# Altium PCB liuyang.PcbDoc (part 2 of 2)
Units mm, origin at the board's own origin, x right, y up, seen from the top; angles counter-clockwise.
Board outline 90.52 x 68.02 mm, 2 copper layers (Top Layer, Bottom Layer); 126 components, 27 nets, 696 pads, 498 vias.
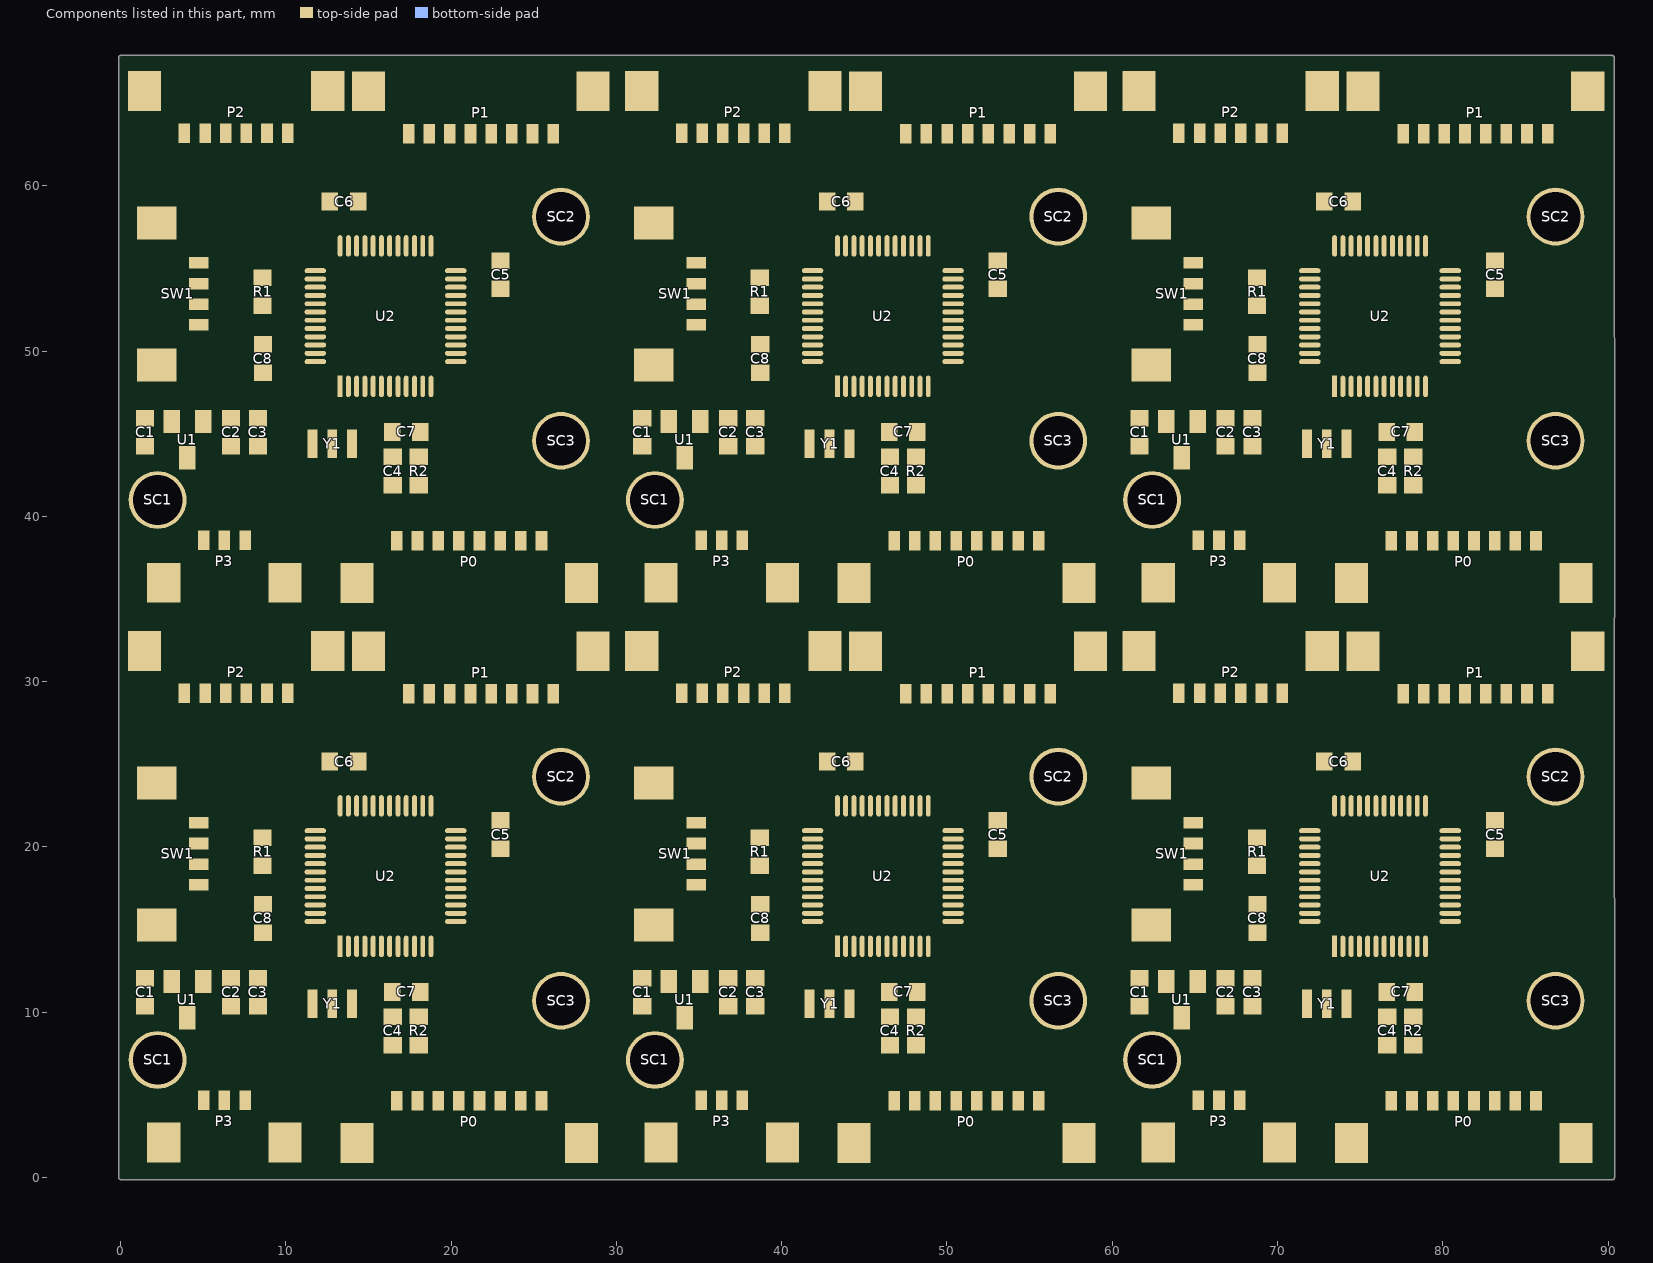
[diagram p2: the components of this part, seen from the top]

## Via types
v1: diameter 0.5, hole 0.3, Top Layer to Bottom Layer, tented both sides, 498 vias

## Nets (pads, with @x,y where several pads share a name; then routed paths per layer and width w, separated by ;. In a path a pad name is that pad's centre, name@x,y a point inside that pad or via, vN(x,y) a via of type N, cw(c..) or ccw(c..) an arc to the next point about the centre after c; other vN are vias at no path point) (continued)
copper on no net: | length 2012.4
  Top Layer w0.254: 4.734,52.842 6.716,52.842 6.934,53.061 6.934,55.093 7.188,55.347 9.855,55.347 10.331,54.871 11.777,54.871 ; 4.734,54.092 6.01,54.092 6.198,54.28 6.198,55.524 6.452,55.778 12.116,55.778 13.157,54.737 14.021,54.737 14.277,54.994 14.277,56.371 ; 5.104,63.185 5.104,56.974 5.715,56.363 v1(10.338,56.363) ; 6.279,38.557 6.279,40.29 9.55,43.561 9.55,46.482 v1(9.525,46.482) ; 8.585,54.444 9.539,54.444 9.754,54.229 9.754,51.613 9.996,51.371 11.777,51.371 ; 8.611,48.706 9.59,48.706 10.255,49.371 11.777,49.371 ; 8.611,50.304 8.712,50.405 ; 8.611,50.405 8.712,50.405 ; 8.854,63.185 8.854,57.237 9.119,56.972 11.811,56.972 12.573,56.21 v1(12.598,56.21) ; v1(9.525,47.854) 10.236,48.565 12.344,48.565 15.113,51.333 v1(18.821,51.333) ; 10.185,46.203 10.871,46.203 12.539,47.871 13.277,47.871 ; v1(10.338,52.832) 10.377,52.871 11.777,52.871 ; 11.602,44.399 11.602,45.714 12.344,46.457 14.554,46.457 15.277,47.18 15.277,47.871 ; 11.777,49.871 10.251,49.871 9.717,50.405 8.712,50.405 ; 12.663,59.055 12.663,57.822 13.277,57.208 13.277,56.371 ; v1(13.589,54.178) 13.589,52.197 13.915,51.871 20.277,51.871 ; 13.777,56.371 13.777,57.237 14.363,57.822 14.363,59.055 ; 14.002,44.399 14.002,45.777 14.173,45.949 15.037,45.949 15.777,46.689 15.777,47.871 ; 15.277,56.371 15.277,59.905 17.418,62.046 17.418,63.16 ; 15.777,56.371 15.777,59.44 18.668,62.331 18.668,63.16 ; 16.277,47.871 16.277,46.533 15.138,45.394 15.138,43.79 15.33,43.598 16.434,43.598 ; 16.277,56.371 16.277,58.645 19.918,62.285 19.918,63.16 ; 16.459,43.598 18.034,43.598 ; 16.777,45.516 v1(16.777,46.05) 16.777,47.871 ; 16.777,56.371 16.777,57.925 21.168,62.316 21.168,63.16 ; 17.277,47.871 17.277,47.112 18.071,46.318 ; 17.277,56.371 17.277,57.638 21.565,61.925 22.073,61.925 22.418,62.271 22.418,63.16 ; 17.777,56.371 17.777,57.376 21.92,61.519 23.419,61.519 23.668,61.768 23.668,63.16 ; 18.096,45.11 18.096,46.318 ; 18.122,45.11 18.872,45.11 19.025,44.958 19.025,40.335 ; 18.277,56.371 18.277,57.216 22.047,60.985 24.13,60.985 24.918,61.773 24.918,63.16 ; 18.777,47.871 18.777,46.856 19.431,46.203 19.431,38.751 19.212,38.532 ; 18.777,56.371 18.777,57.03 22.123,60.376 24.816,60.376 26.168,61.728 26.168,63.16 ; v1(18.847,52.4) 18.876,52.371 20.277,52.371 ; 20.277,49.371 20.462,49.186 20.462,38.532 ; 20.277,49.871 21.122,49.871 21.641,49.352 21.641,41.072 22.022,40.691 25.095,40.691 25.461,40.325 25.461,38.532 ; 20.277,50.371 21.537,50.371 22.25,49.657 22.25,41.656 22.479,41.427 24.181,41.427 v1(24.181,41.504) ; 20.277,50.871 21.824,50.871 22.911,49.784 v1(22.911,42.037) ; 20.277,51.371 22.542,51.371 v1(22.555,51.384) ; 20.277,54.371 21.169,54.371 21.754,53.786 22.987,53.786 ; 20.277,54.871 21.114,54.871 21.729,55.485 22.987,55.485 ; v1(21.031,48.336) 21.057,48.311 21.057,40.716 21.712,40.061 21.712,38.532 ; v1(22.911,39.954) 22.962,39.903 22.962,38.532 ; v1(24.206,39.929) 24.206,38.537 24.212,38.532 ; 34.823,18.958 36.804,18.958 37.023,19.177 37.023,21.209 37.277,21.463 39.944,21.463 40.42,20.987 41.866,20.987 ; 34.823,20.208 36.098,20.208 36.286,20.396 36.286,21.641 36.54,21.895 42.204,21.895 43.246,20.853 44.109,20.853 44.366,21.11 44.366,22.487 ; 34.823,52.842 36.804,52.842 37.023,53.061 37.023,55.093 37.277,55.347 39.944,55.347 40.42,54.871 41.866,54.871 ; 34.823,54.092 36.098,54.092 36.286,54.28 36.286,55.524 36.54,55.778 42.204,55.778 43.246,54.737 44.109,54.737 44.366,54.994 44.366,56.371 ; 35.193,29.302 35.193,23.09 35.804,22.479 v1(40.426,22.479) ; 35.193,63.185 35.193,56.974 35.804,56.363 v1(40.426,56.363) ; 36.368,4.674 36.368,6.406 39.639,9.677 39.639,12.598 v1(39.614,12.598) ; 36.368,38.557 36.368,40.29 39.639,43.561 39.639,46.482 v1(39.614,46.482) ; 38.674,20.56 39.627,20.56 39.842,20.345 39.842,17.729 40.084,17.487 41.866,17.487 ; 38.674,54.444 39.627,54.444 39.842,54.229 39.842,51.613 40.084,51.371 41.866,51.371 ; 38.699,14.822 39.678,14.822 40.343,15.487 41.866,15.487 ; 38.699,16.42 38.801,16.522 ; 38.699,16.522 38.801,16.522 ; 38.699,48.706 39.678,48.706 40.343,49.371 41.866,49.371 ; 38.699,50.304 38.801,50.405 ; 38.699,50.405 38.801,50.405 ; 38.942,29.302 38.942,23.354 39.207,23.089 41.9,23.089 42.662,22.327 v1(42.687,22.327) ; 38.942,63.185 38.942,57.237 39.207,56.972 41.9,56.972 42.662,56.21 v1(42.687,56.21) ; v1(39.614,13.97) 40.325,14.681 42.433,14.681 45.202,17.45 v1(48.91,17.45) ; v1(39.614,47.854) 40.325,48.565 42.433,48.565 45.202,51.333 v1(48.91,51.333) ; 40.274,12.319 40.96,12.319 42.628,13.987 43.366,13.987 ; 40.274,46.203 40.96,46.203 42.628,47.871 43.366,47.871 ; v1(40.426,18.948) 40.465,18.987 41.866,18.987 ; v1(40.426,52.832) 40.465,52.871 41.866,52.871 ; 41.69,10.516 41.69,11.83 42.433,12.573 44.643,12.573 45.366,13.296 45.366,13.987 ; 41.69,44.399 41.69,45.714 42.433,46.457 44.643,46.457 45.366,47.18 45.366,47.871 ; 41.866,15.987 40.34,15.987 39.805,16.522 38.801,16.522 ; 41.866,49.871 40.34,49.871 39.805,50.405 38.801,50.405 ; 42.752,25.171 42.752,23.938 43.366,23.324 43.366,22.487 ; 42.752,59.055 42.752,57.822 43.366,57.208 43.366,56.371 ; v1(43.678,20.295) 43.678,18.313 44.004,17.987 50.366,17.987 ; v1(43.678,54.178) 43.678,52.197 44.004,51.871 50.366,51.871 ; 43.866,22.487 43.866,23.353 44.451,23.938 44.451,25.171 ; 43.866,56.371 43.866,57.237 44.451,57.822 44.451,59.055 ; 44.09,10.516 44.09,11.893 44.262,12.065 45.125,12.065 45.866,12.806 45.866,13.987 ; 44.09,44.399 44.09,45.777 44.262,45.949 45.125,45.949 45.866,46.689 45.866,47.871 ; 45.366,22.487 45.366,26.022 47.507,28.163 47.507,29.276 ; 45.366,56.371 45.366,59.905 47.507,62.046 47.507,63.16 ; 45.866,22.487 45.866,25.556 48.757,28.447 48.757,29.276 ; 45.866,56.371 45.866,59.44 48.757,62.331 48.757,63.16 ; 46.366,13.987 46.366,12.649 45.227,11.51 45.227,9.906 45.419,9.714 46.522,9.714 ; 46.366,22.487 46.366,24.761 50.007,28.402 50.007,29.276 ; 46.366,47.871 46.366,46.533 45.227,45.394 45.227,43.79 45.419,43.598 46.522,43.598 ; 46.366,56.371 46.366,58.645 50.007,62.285 50.007,63.16 ; 46.548,9.714 48.123,9.714 ; 46.548,43.598 48.123,43.598 ; 46.866,11.633 v1(46.866,12.167) 46.866,13.987 ; 46.866,22.487 46.866,24.042 51.257,28.433 51.257,29.276 ; 46.866,45.516 v1(46.866,46.05) 46.866,47.871 ; 46.866,56.371 46.866,57.925 51.257,62.316 51.257,63.16 ; 47.366,13.987 47.366,13.228 48.16,12.434 ; 47.366,22.487 47.366,23.754 51.653,28.042 52.161,28.042 52.507,28.387 52.507,29.276 ; 47.366,47.871 47.366,47.112 48.16,46.318 ; 47.366,56.371 47.366,57.638 51.653,61.925 52.161,61.925 52.507,62.271 52.507,63.16 ; 47.866,22.487 47.866,23.492 52.009,27.635 53.507,27.635 53.757,27.884 53.757,29.276 ; 47.866,56.371 47.866,57.376 52.009,61.519 53.507,61.519 53.757,61.768 53.757,63.16 ; 48.185,11.227 48.185,12.434 ; 48.185,45.11 48.185,46.318 ; 48.211,11.227 48.961,11.227 49.113,11.074 49.113,6.452 ; 48.211,45.11 48.961,45.11 49.113,44.958 49.113,40.335 ; 48.366,22.487 48.366,23.332 52.136,27.102 54.219,27.102 55.007,27.89 55.007,29.276 ; 48.366,56.371 48.366,57.216 52.136,60.985 54.219,60.985 55.007,61.773 55.007,63.16 ; 48.866,13.987 48.866,12.973 49.52,12.319 49.52,4.867 49.3,4.648 ; 48.866,22.487 48.866,23.146 52.212,26.492 54.904,26.492 56.257,27.845 56.257,29.276 ; 48.866,47.871 48.866,46.856 49.52,46.203 49.52,38.751 49.3,38.532 ; 48.866,56.371 48.866,57.03 52.212,60.376 54.904,60.376 56.257,61.728 56.257,63.16 ; v1(48.935,18.517) 48.965,18.487 50.366,18.487 ; v1(48.935,52.4) 48.965,52.371 50.366,52.371 ; 50.366,15.487 50.55,15.303 50.55,4.648 ; 50.366,15.987 51.211,15.987 51.729,15.469 51.729,7.188 52.11,6.807 55.184,6.807 55.55,6.441 55.55,4.648 ; 50.366,16.487 51.625,16.487 52.339,15.773 52.339,7.772 52.568,7.544 54.269,7.544 v1(54.269,7.62) ; 50.366,16.987 51.913,16.987 52.999,15.9 v1(52.999,8.153) ; 50.366,17.487 52.63,17.487 v1(52.644,17.501) ; 50.366,20.487 51.257,20.487 51.843,19.902 53.076,19.902 ; 50.366,20.987 51.203,20.987 51.817,21.602 53.076,21.602 ; 50.366,49.371 50.55,49.186 50.55,38.532 ; 50.366,49.871 51.211,49.871 51.729,49.352 51.729,41.072 52.11,40.691 55.184,40.691 55.55,40.325 55.55,38.532 ; 50.366,50.371 51.625,50.371 52.339,49.657 52.339,41.656 52.568,41.427 54.269,41.427 v1(54.269,41.504) ; 50.366,50.871 51.913,50.871 52.999,49.784 v1(52.999,42.037) ; 50.366,51.371 52.63,51.371 v1(52.644,51.384) ; 50.366,54.371 51.257,54.371 51.843,53.786 53.076,53.786 ; 50.366,54.871 51.203,54.871 51.817,55.485 53.076,55.485 ; v1(51.12,14.453) 51.145,14.427 51.145,6.833 51.8,6.178 51.8,4.648 ; v1(51.12,48.336) 51.145,48.311 51.145,40.716 51.8,40.061 51.8,38.532 ; v1(52.999,6.071) 53.05,6.02 53.05,4.648 ; v1(52.999,39.954) 53.05,39.903 53.05,38.532 ; v1(54.295,6.045) 54.295,4.654 54.3,4.648 ; v1(54.295,39.929) 54.295,38.537 54.3,38.532 ; 64.912,18.958 66.893,18.958 67.111,19.177 67.111,21.209 67.365,21.463 70.032,21.463 70.508,20.987 71.955,20.987 ; 64.912,20.208 66.187,20.208 66.375,20.396 66.375,21.641 66.629,21.895 72.293,21.895 73.334,20.853 74.198,20.853 74.455,21.11 74.455,22.487 ; 64.912,52.842 66.893,52.842 67.111,53.061 67.111,55.093 67.365,55.347 70.032,55.347 70.508,54.871 71.955,54.871 ; 64.912,54.092 66.187,54.092 66.375,54.28 66.375,55.524 66.629,55.778 72.293,55.778 73.334,54.737 74.198,54.737 74.455,54.994 74.455,56.371 ; 65.281,29.302 65.281,23.09 65.892,22.479 v1(70.515,22.479) ; 65.281,63.185 65.281,56.974 65.892,56.363 v1(70.515,56.363) ; 66.457,4.674 66.457,6.406 69.728,9.677 69.728,12.598 v1(69.702,12.598) ; 66.457,38.557 66.457,40.29 69.728,43.561 69.728,46.482 v1(69.702,46.482) ; 68.762,20.56 69.716,20.56 69.931,20.345 69.931,17.729 70.173,17.487 71.955,17.487 ; 68.762,54.444 69.716,54.444 69.931,54.229 69.931,51.613 70.173,51.371 71.955,51.371 ; 68.788,14.822 69.767,14.822 70.432,15.487 71.955,15.487 ; 68.788,16.42 68.889,16.522 ; 68.788,16.522 68.889,16.522 ; 68.788,48.706 69.767,48.706 70.432,49.371 71.955,49.371 ; 68.788,50.304 68.889,50.405 ; 68.788,50.405 68.889,50.405 ; 69.031,29.302 69.031,23.354 69.296,23.089 71.988,23.089 72.75,22.327 v1(72.776,22.327) ; 69.031,63.185 69.031,57.237 69.296,56.972 71.988,56.972 72.75,56.21 v1(72.776,56.21) ; v1(69.702,13.97) 70.413,14.681 72.522,14.681 75.29,17.45 v1(78.999,17.45) ; v1(69.702,47.854) 70.413,48.565 72.522,48.565 75.29,51.333 v1(78.999,51.333) ; 70.363,12.319 71.048,12.319 72.717,13.987 73.455,13.987 ; 70.363,46.203 71.048,46.203 72.717,47.871 73.455,47.871 ; v1(70.515,18.948) 70.554,18.987 71.955,18.987 ; v1(70.515,52.832) 70.554,52.871 71.955,52.871 ; 71.779,10.516 71.779,11.83 72.522,12.573 74.731,12.573 75.455,13.296 75.455,13.987 ; 71.779,44.399 71.779,45.714 72.522,46.457 74.731,46.457 75.455,47.18 75.455,47.871 ; 71.955,15.987 70.428,15.987 69.894,16.522 68.889,16.522 ; 71.955,49.871 70.428,49.871 69.894,50.405 68.889,50.405 ; 72.84,25.171 72.84,23.938 73.455,23.324 73.455,22.487 ; 72.84,59.055 72.84,57.822 73.455,57.208 73.455,56.371 ; v1(73.766,20.295) 73.766,18.313 74.092,17.987 80.455,17.987 ; v1(73.766,54.178) 73.766,52.197 74.092,51.871 80.455,51.871 ; 73.955,22.487 73.955,23.353 74.54,23.938 74.54,25.171 ; 73.955,56.371 73.955,57.237 74.54,57.822 74.54,59.055 ; 74.179,10.516 74.179,11.893 74.35,12.065 75.214,12.065 75.955,12.806 75.955,13.987 ; 74.179,44.399 74.179,45.777 74.35,45.949 75.214,45.949 75.955,46.689 75.955,47.871 ; 75.455,22.487 75.455,26.022 77.596,28.163 77.596,29.276 ; 75.455,56.371 75.455,59.905 77.596,62.046 77.596,63.16 ; 75.955,22.487 75.955,25.556 78.846,28.447 78.846,29.276 ; 75.955,56.371 75.955,59.44 78.846,62.331 78.846,63.16 ; 76.455,13.987 76.455,12.649 75.316,11.51 75.316,9.906 75.507,9.714 76.611,9.714 ; 76.455,22.487 76.455,24.761 80.096,28.402 80.096,29.276 ; 76.455,47.871 76.455,46.533 75.316,45.394 75.316,43.79 75.507,43.598 76.611,43.598 ; 76.455,56.371 76.455,58.645 80.096,62.285 80.096,63.16 ; 76.636,9.714 78.211,9.714 ; 76.636,43.598 78.211,43.598 ; 76.955,11.633 v1(76.955,12.167) 76.955,13.987 ; 76.955,22.487 76.955,24.042 81.346,28.433 81.346,29.276 ; 76.955,45.516 v1(76.955,46.05) 76.955,47.871 ; 76.955,56.371 76.955,57.925 81.346,62.316 81.346,63.16 ; 77.455,13.987 77.455,13.228 78.248,12.434 ; 77.455,22.487 77.455,23.754 81.742,28.042 82.25,28.042 82.595,28.387 82.595,29.276 ; 77.455,47.871 77.455,47.112 78.248,46.318 ; 77.455,56.371 77.455,57.638 81.742,61.925 82.25,61.925 82.595,62.271 82.595,63.16 ; 77.955,22.487 77.955,23.492 82.097,27.635 83.596,27.635 83.845,27.884 83.845,29.276 ; 77.955,56.371 77.955,57.376 82.097,61.519 83.596,61.519 83.845,61.768 83.845,63.16 ; 78.274,11.227 78.274,12.434 ; 78.274,45.11 78.274,46.318 ; 78.299,11.227 79.049,11.227 79.202,11.074 79.202,6.452 ; 78.299,45.11 79.049,45.11 79.202,44.958 79.202,40.335 ; 78.455,22.487 78.455,23.332 82.224,27.102 84.307,27.102 85.095,27.89 85.095,29.276 ; 78.455,56.371 78.455,57.216 82.224,60.985 84.307,60.985 85.095,61.773 85.095,63.16 ; 78.955,13.987 78.955,12.973 79.608,12.319 79.608,4.867 79.389,4.648 ; 78.955,22.487 78.955,23.146 82.301,26.492 84.993,26.492 86.345,27.845 86.345,29.276 ; 78.955,47.871 78.955,46.856 79.608,46.203 79.608,38.751 79.389,38.532 ; 78.955,56.371 78.955,57.03 82.301,60.376 84.993,60.376 86.345,61.728 86.345,63.16 ; v1(79.024,18.517) 79.053,18.487 80.455,18.487 ; v1(79.024,52.4) 79.053,52.371 80.455,52.371 ; 80.455,15.487 80.639,15.303 80.639,4.648 ; 80.455,15.987 81.299,15.987 81.818,15.469 81.818,7.188 82.199,6.807 85.272,6.807 85.639,6.441 85.639,4.648 ; 80.455,16.487 81.714,16.487 82.428,15.773 82.428,7.772 82.656,7.544 84.358,7.544 v1(84.358,7.62) ; 80.455,16.987 82.001,16.987 83.088,15.9 v1(83.088,8.153) ; 80.455,17.487 82.719,17.487 v1(82.732,17.501) ; 80.455,20.487 81.346,20.487 81.931,19.902 83.164,19.902 ; 80.455,20.987 81.291,20.987 81.906,21.602 83.164,21.602 ; 80.455,49.371 80.639,49.186 80.639,38.532 ; 80.455,49.871 81.299,49.871 81.818,49.352 81.818,41.072 82.199,40.691 85.272,40.691 85.639,40.325 85.639,38.532 ; 80.455,50.371 81.714,50.371 82.428,49.657 82.428,41.656 82.656,41.427 84.358,41.427 v1(84.358,41.504) ; 80.455,50.871 82.001,50.871 83.088,49.784 v1(83.088,42.037) ; 80.455,51.371 82.719,51.371 v1(82.732,51.384) ; 80.455,54.371 81.346,54.371 81.931,53.786 83.164,53.786 ; 80.455,54.871 81.291,54.871 81.906,55.485 83.164,55.485 ; v1(81.208,14.453) 81.234,14.427 81.234,6.833 81.889,6.178 81.889,4.648 ; v1(81.208,48.336) 81.234,48.311 81.234,40.716 81.889,40.061 81.889,38.532 ; v1(83.088,6.071) 83.139,6.02 83.139,4.648 ; v1(83.088,39.954) 83.139,39.903 83.139,38.532 ; v1(84.383,6.045) 84.383,4.654 84.389,4.648 ; v1(84.383,39.929) 84.383,38.537 84.389,38.532
  Top Layer w0.508: 4.734,55.342 3.433,55.342 3.353,55.423 ; 8.306,45.935 8.306,47.193 ; 8.306,48.616 8.306,47.193 ; 12.663,59.055 10.516,59.055 10.104,59.467 10.104,63.185 10.104,64.039 9.525,64.618 4.547,64.618 3.854,63.925 3.854,63.185 3.854,61.119 4.242,60.731 4.242,56.744 3.353,55.855 3.353,55.423 ; 18.034,41.898 18.034,40.462 18.161,40.335 ; 18.898,40.335 18.161,40.335 ; 22.987,55.485 24.982,55.485 25.527,54.94 25.527,52.248 23.876,50.597 23.876,43.459 26.594,40.742 26.594,37.643 25.756,36.805 18.161,36.805 17.962,37.004 17.962,38.532 17.962,40.255 17.882,40.335 ; 34.823,21.459 33.522,21.459 33.441,21.539 ; 34.823,55.342 33.522,55.342 33.441,55.423 ; 38.394,12.051 38.394,13.31 ; 38.394,14.732 38.394,13.31 ; 38.394,45.935 38.394,47.193 ; 38.394,48.616 38.394,47.193 ; 42.752,25.171 40.604,25.171 40.193,25.583 40.193,29.302 40.193,30.155 39.614,30.734 34.635,30.734 33.943,30.041 33.943,29.302 33.943,27.236 34.33,26.848 34.33,22.86 33.441,21.971 33.441,21.539 ; 42.752,59.055 40.604,59.055 40.193,59.467 40.193,63.185 40.193,64.039 39.614,64.618 34.635,64.618 33.943,63.925 33.943,63.185 33.943,61.119 34.33,60.731 34.33,56.744 33.441,55.855 33.441,55.423 ; 48.123,8.015 48.123,6.579 48.25,6.452 ; 48.123,41.898 48.123,40.462 48.25,40.335 ; 48.986,6.452 48.25,6.452 ; 48.986,40.335 48.25,40.335 ; 53.076,21.602 55.071,21.602 55.616,21.057 55.616,18.364 53.965,16.713 53.965,9.576 56.682,6.858 56.682,3.759 55.844,2.921 48.25,2.921 48.051,3.12 48.051,4.648 48.051,6.371 47.97,6.452 ; 53.076,55.485 55.071,55.485 55.616,54.94 55.616,52.248 53.965,50.597 53.965,43.459 56.682,40.742 56.682,37.643 55.844,36.805 48.25,36.805 48.051,37.004 48.051,38.532 48.051,40.255 47.97,40.335 ; 64.912,21.459 63.611,21.459 63.53,21.539 ; 64.912,55.342 63.611,55.342 63.53,55.423 ; 68.483,12.051 68.483,13.31 ; 68.483,14.732 68.483,13.31 ; 68.483,45.935 68.483,47.193 ; 68.483,48.616 68.483,47.193 ; 72.84,25.171 70.693,25.171 70.281,25.583 70.281,29.302 70.281,30.155 69.702,30.734 64.724,30.734 64.031,30.041 64.031,29.302 64.031,27.236 64.419,26.848 64.419,22.86 63.53,21.971 63.53,21.539 ; 72.84,59.055 70.693,59.055 70.281,59.467 70.281,63.185 70.281,64.039 69.702,64.618 64.724,64.618 64.031,63.925 64.031,63.185 64.031,61.119 64.419,60.731 64.419,56.744 63.53,55.855 63.53,55.423 ; 78.211,8.015 78.211,6.579 78.338,6.452 ; 78.211,41.898 78.211,40.462 78.338,40.335 ; 79.075,6.452 78.338,6.452 ; 79.075,40.335 78.338,40.335 ; 83.164,21.602 85.159,21.602 85.704,21.057 85.704,18.364 84.053,16.713 84.053,9.576 86.771,6.858 86.771,3.759 85.933,2.921 78.338,2.921 78.139,3.12 78.139,4.648 78.139,6.371 78.059,6.452 ; 83.164,55.485 85.159,55.485 85.704,54.94 85.704,52.248 84.053,50.597 84.053,43.459 86.771,40.742 86.771,37.643 85.933,36.805 78.338,36.805 78.139,37.004 78.139,38.532 78.139,40.255 78.059,40.335 ; 3.353,55.423 3.353,51.156 4.343,50.165 4.343,48.133 5.283,47.193 8.306,47.193 ; 8.306,47.193 9.906,47.193 10.185,46.914 10.185,46.203 10.185,41.351 11.201,40.335 17.882,40.335 ; 17.882,40.335 18.161,40.335 ; 33.441,21.539 33.441,17.272 34.432,16.281 34.432,14.249 35.372,13.31 38.394,13.31 ; 33.441,55.423 33.441,51.156 34.432,50.165 34.432,48.133 35.372,47.193 38.394,47.193 ; 38.394,13.31 39.995,13.31 40.274,13.03 40.274,12.319 40.274,7.468 41.29,6.452 47.97,6.452 ; 38.394,47.193 39.995,47.193 40.274,46.914 40.274,46.203 40.274,41.351 41.29,40.335 47.97,40.335 ; 47.97,6.452 48.25,6.452 ; 47.97,40.335 48.25,40.335 ; 63.53,21.539 63.53,17.272 64.521,16.281 64.521,14.249 65.46,13.31 68.483,13.31 ; 63.53,55.423 63.53,51.156 64.521,50.165 64.521,48.133 65.46,47.193 68.483,47.193 ; 68.483,13.31 70.083,13.31 70.363,13.03 70.363,12.319 70.363,7.468 71.379,6.452 78.059,6.452 ; 68.483,47.193 70.083,47.193 70.363,46.914 70.363,46.203 70.363,41.351 71.379,40.335 78.059,40.335 ; 78.059,6.452 78.338,6.452 ; 78.059,40.335 78.338,40.335
  Top Layer w0.762: 5.17,45.935 8.306,45.935 ; 35.259,12.051 38.394,12.051 ; 35.259,45.935 38.394,45.935 ; 65.347,12.051 68.483,12.051 ; 65.347,45.935 68.483,45.935
  Top Layer w1.016: 1.473,44.235 3.357,44.235 4.039,43.553 4.529,43.553 5.029,43.053 5.029,38.557 ; 4.989,45.753 5.17,45.935 ; 31.562,10.352 33.445,10.352 34.127,9.67 34.618,9.67 35.118,9.169 35.118,4.674 ; 31.562,44.235 33.445,44.235 34.127,43.553 34.618,43.553 35.118,43.053 35.118,38.557 ; 35.077,11.87 35.259,12.051 ; 35.077,45.753 35.259,45.935 ; 61.65,10.352 63.534,10.352 64.216,9.67 64.706,9.67 65.206,9.169 65.206,4.674 ; 61.65,44.235 63.534,44.235 64.216,43.553 64.706,43.553 65.206,43.053 65.206,38.557 ; 65.166,11.87 65.347,12.051 ; 65.166,45.753 65.347,45.935
  Bottom Layer w0.254: v1(9.525,46.482) v1(9.525,47.854) ; v1(10.338,52.832) v1(10.338,56.363) ; v1(12.598,56.21) 13.589,55.22 v1(13.589,54.178) ; v1(18.821,51.333) 18.821,52.4 v1(18.847,52.4) ; v1(21.031,48.336) 21.057,48.362 21.057,49.098 22.555,50.597 v1(22.555,51.384) ; v1(22.911,39.954) v1(22.911,42.037) ; v1(24.181,41.504) 24.206,41.504 v1(24.206,39.929) ; v1(39.614,12.598) v1(39.614,13.97) ; v1(39.614,46.482) v1(39.614,47.854) ; v1(40.426,18.948) v1(40.426,22.479) ; v1(40.426,52.832) v1(40.426,56.363) ; v1(42.687,22.327) 43.678,21.336 v1(43.678,20.295) ; v1(42.687,56.21) 43.678,55.22 v1(43.678,54.178) ; v1(48.91,17.45) 48.91,18.517 v1(48.935,18.517) ; v1(48.91,51.333) 48.91,52.4 v1(48.935,52.4) ; v1(51.12,14.453) 51.145,14.478 51.145,15.215 52.644,16.713 v1(52.644,17.501) ; v1(51.12,48.336) 51.145,48.362 51.145,49.098 52.644,50.597 v1(52.644,51.384) ; v1(52.999,6.071) v1(52.999,8.153) ; v1(52.999,39.954) v1(52.999,42.037) ; v1(54.269,7.62) 54.295,7.62 v1(54.295,6.045) ; v1(54.269,41.504) 54.295,41.504 v1(54.295,39.929) ; v1(69.702,12.598) v1(69.702,13.97) ; v1(69.702,46.482) v1(69.702,47.854) ; v1(70.515,18.948) v1(70.515,22.479) ; v1(70.515,52.832) v1(70.515,56.363) ; v1(72.776,22.327) 73.766,21.336 v1(73.766,20.295) ; v1(72.776,56.21) 73.766,55.22 v1(73.766,54.178) ; v1(78.999,17.45) 78.999,18.517 v1(79.024,18.517) ; v1(78.999,51.333) 78.999,52.4 v1(79.024,52.4) ; v1(81.208,14.453) 81.234,14.478 81.234,15.215 82.732,16.713 v1(82.732,17.501) ; v1(81.208,48.336) 81.234,48.362 81.234,49.098 82.732,50.597 v1(82.732,51.384) ; v1(83.088,6.071) v1(83.088,8.153) ; v1(83.088,39.954) v1(83.088,42.037) ; v1(84.358,7.62) 84.383,7.62 v1(84.383,6.045) ; v1(84.358,41.504) 84.383,41.504 v1(84.383,39.929)
  other v1: 45.964,2.007 46.751,2.007 76.052,2.007 76.84,2.007 36.489,2.235 37.455,2.235 38.318,2.235 66.578,2.235 67.543,2.235 68.407,2.235 36.489,3.023 37.455,3.023 38.344,3.023 45.964,3.023 66.578,3.023 67.543,3.023 68.432,3.023 76.052,3.023 46.751,3.048 76.84,3.048 44.795,4.013 74.884,4.013 45.76,5.537 75.849,5.537 38.521,6.172 39.334,6.172 68.61,6.172 69.423,6.172 37.632,6.223 67.721,6.223 39.207,6.909 69.296,6.909 38.369,7.01 68.458,7.01 36.515,7.62 66.603,7.62 41.646,7.722 42.916,7.722 44.186,7.722 45.202,7.722 71.734,7.722 73.004,7.722 74.274,7.722 75.29,7.722 39.207,7.874 69.296,7.874 36.54,8.382 37.251,8.382 66.629,8.382 67.34,8.382 41.646,8.738 42.916,8.738 44.186,8.738 45.202,8.738 71.734,8.738 73.004,8.738 74.274,8.738 75.29,8.738 36.515,9.119 37.759,9.119 66.603,9.119 67.848,9.119 35.423,10.643 65.511,10.643 32.324,13.487 62.412,13.487 31.511,13.513 33.162,13.513 61.6,13.513 63.251,13.513 36.337,14.326 37.607,14.326 66.426,14.326 67.696,14.326 35.423,14.783 65.511,14.783 37.632,15.57 67.721,15.57 36.337,15.596 66.426,15.596 35.423,16.307 65.511,16.307 37.632,17.094 67.721,17.094 36.337,17.12 66.426,17.12 37.632,18.364 67.721,18.364 36.337,18.39 66.426,18.39 53.076,18.542 54.574,18.542 83.164,18.542 84.663,18.542 51.882,18.567 81.97,18.567 54.625,19.482 84.714,19.482 37.632,19.634 67.721,19.634 54.701,20.752 84.79,20.752 37.632,20.904 67.721,20.904 36.439,23.266 37.709,23.266 66.527,23.266 67.797,23.266 36.439,24.79 37.709,24.79 66.527,24.79 67.797,24.79 36.439,26.314 37.709,26.314 66.527,26.314 67.797,26.314 41.798,26.416 42.721,26.416 43.644,26.416 44.567,26.416 71.887,26.416 72.81,26.416 73.732,26.416 74.655,26.416 41.722,27.33 42.696,27.33 43.669,27.33 44.643,27.33 71.81,27.33 72.784,27.33 73.758,27.33 74.731,27.33 36.439,27.584 37.709,27.584 66.527,27.584 67.797,27.584 15.875,35.89 16.662,35.89 45.964,35.89 46.751,35.89 76.052,35.89 76.84,35.89 6.401,36.119 7.366,36.119 8.23,36.119 36.489,36.119 37.455,36.119 38.318,36.119 66.578,36.119 67.543,36.119 68.407,36.119 6.401,36.906 7.366,36.906 8.255,36.906 15.875,36.906 36.489,36.906 37.455,36.906 38.344,36.906 45.964,36.906 66.578,36.906 67.543,36.906 68.432,36.906 76.052,36.906 16.662,36.932 46.751,36.932 76.84,36.932 14.707,37.897 44.795,37.897 74.884,37.897 15.672,39.421 45.76,39.421 75.849,39.421 8.433,40.056 9.246,40.056 38.521,40.056 39.334,40.056 68.61,40.056 69.423,40.056 7.544,40.107 37.632,40.107 67.721,40.107 9.119,40.792 39.207,40.792 69.296,40.792 8.28,40.894 38.369,40.894 68.458,40.894 6.426,41.504 36.515,41.504 66.603,41.504 11.557,41.605 12.827,41.605 14.097,41.605 15.113,41.605 41.646,41.605 42.916,41.605 44.186,41.605 45.202,41.605 71.734,41.605 73.004,41.605 74.274,41.605 75.29,41.605 9.119,41.758 39.207,41.758 69.296,41.758 6.452,42.266 7.163,42.266 36.54,42.266 37.251,42.266 66.629,42.266 67.34,42.266 11.557,42.621 12.827,42.621 14.097,42.621 15.113,42.621 41.646,42.621 42.916,42.621 44.186,42.621 45.202,42.621 71.734,42.621 73.004,42.621 74.274,42.621 75.29,42.621 6.426,43.002 7.671,43.002 36.515,43.002 37.759,43.002 66.603,43.002 67.848,43.002 5.334,44.526 35.423,44.526 65.511,44.526 2.235,47.371 32.324,47.371 62.412,47.371 1.422,47.396 3.073,47.396 31.511,47.396 33.162,47.396 61.6,47.396 63.251,47.396 6.248,48.209 7.518,48.209 36.337,48.209 37.607,48.209 66.426,48.209 67.696,48.209 5.334,48.666 35.423,48.666 65.511,48.666 7.544,49.454 37.632,49.454 67.721,49.454 6.248,49.479 36.337,49.479 66.426,49.479 5.334,50.19 35.423,50.19 65.511,50.19 7.544,50.978 37.632,50.978 67.721,50.978 6.248,51.003 36.337,51.003 66.426,51.003 7.544,52.248 37.632,52.248 67.721,52.248 6.248,52.273 36.337,52.273 66.426,52.273 22.987,52.426 24.486,52.426 53.076,52.426 54.574,52.426 83.164,52.426 84.663,52.426 21.793,52.451 51.882,52.451 81.97,52.451 24.536,53.365 54.625,53.365 84.714,53.365 7.544,53.518 37.632,53.518 67.721,53.518 24.613,54.635 54.701,54.635 84.79,54.635 7.544,54.788 37.632,54.788 67.721,54.788 6.35,57.15 7.62,57.15 36.439,57.15 37.709,57.15 66.527,57.15 67.797,57.15 6.35,58.674 7.62,58.674 36.439,58.674 37.709,58.674 66.527,58.674 67.797,58.674 6.35,60.198 7.62,60.198 36.439,60.198 37.709,60.198 66.527,60.198 67.797,60.198 11.709,60.3 12.632,60.3 13.555,60.3 14.478,60.3 41.798,60.3 42.721,60.3 43.644,60.3 44.567,60.3 71.887,60.3 72.81,60.3 73.732,60.3 74.655,60.3 11.633,61.214 12.607,61.214 13.581,61.214 14.554,61.214 41.722,61.214 42.696,61.214 43.669,61.214 44.643,61.214 71.81,61.214 72.784,61.214 73.758,61.214 74.731,61.214 6.35,61.468 7.62,61.468 36.439,61.468 37.709,61.468 66.527,61.468 67.797,61.468

## Polygon pours and split planes (outlines as drawn)
no net on Top Layer "TGND" (solid, remove dead copper, pour order 84): 61.177,34.884 89.177,34.884 89.177,66.884 61.177,66.884 61.177,34.884
no net on Top Layer "TGND" (solid, remove dead copper, pour order 80): 31.089,34.884 59.089,34.884 59.089,66.884 31.089,66.884 31.089,34.884
no net on Top Layer "TGND" (solid, remove dead copper, pour order 76): 1,34.884 29,34.884 29,66.884 1,66.884 1,34.884
no net on Top Layer "TGND" (solid, remove dead copper, pour order 72): 61.177,1 89.177,1 89.177,33 61.177,33 61.177,1
no net on Top Layer "TGND" (solid, remove dead copper, pour order 68): 31.089,1 59.089,1 59.089,33 31.089,33 31.089,1
GND on Top Layer "TGND" (solid, remove dead copper, pour order 0): 1,1 29,1 29,33 1,33 1,1
no net on Bottom Layer "BGND" (solid, remove dead copper, pour order 86): 61.177,34.884 89.177,34.884 89.177,66.884 61.177,66.884 61.177,34.884
no net on Bottom Layer "BGND" (solid, remove dead copper, pour order 82): 31.089,34.884 59.089,34.884 59.089,66.884 31.089,66.884 31.089,34.884
no net on Bottom Layer "BGND" (solid, remove dead copper, pour order 78): 1,34.884 29,34.884 29,66.884 1,66.884 1,34.884
no net on Bottom Layer "BGND" (solid, remove dead copper, pour order 74): 61.177,1 89.177,1 89.177,33 61.177,33 61.177,1
no net on Bottom Layer "BGND" (solid, remove dead copper, pour order 70): 31.089,1 59.089,1 59.089,33 31.089,33 31.089,1
GND on Bottom Layer "BGND" (solid, remove dead copper, pour order 2): 1,1 29,1 29,33 1,33 1,1

## Keep-outs
Keep-Out Layer:
  lines w0.254: 0,33.884 0,67.767 30.089,67.767 ; 0,33.884 30.089,33.884 ; 0,33.884 0,0 30.089,0 ; 0,33.884 30.089,33.884 ; 30.089,0 30.089,33.884 ; 30.089,0 60.177,0 ; 30.089,0 30.089,33.884 ; 30.089,33.884 30.089,67.767 ; 30.089,33.884 60.177,33.884 ; 30.089,33.884 30.089,67.767 ; 30.089,33.884 60.177,33.884 ; 30.089,67.767 60.177,67.767 ; 60.177,0 60.177,33.884 ; 60.177,0 90.266,0 90.266,33.884 ; 60.177,0 60.177,33.884 ; 60.177,33.884 60.177,67.767 ; 60.177,33.884 90.266,33.884 ; 60.177,33.884 60.177,67.767 ; 60.177,33.884 90.266,33.884 ; 60.177,67.767 90.266,67.767 90.266,33.884

## Silkscreen, mask and mechanical layers (free items; w line width, h text height)
Top Overlay:
  lines w0.254: -2.616,1.522 -2.108,-0.002 ; -2.616,66.243 -2.108,67.767 ; -2.362,-0.002 -1.854,-0.002 ; -2.362,67.767 -1.854,67.767 ; -2.108,26.62 -2.108,-0.002 ; -2.108,41.145 -2.108,67.767 ; -1.6,1.522 -2.108,-0.002 ; -1.6,66.243 -2.108,67.767 ; -0.005,-1.626 -0.005,-1.118 ; 1.519,-1.879 -0.005,-1.372 ; 1.519,-0.863 -0.005,-1.372 ; 37.109,-1.361 -0.005,-1.372 ; 53.157,-1.357 90.272,-1.346 ; 88.748,-1.855 90.272,-1.346 ; 88.747,-0.839 90.272,-1.346 ; 90.272,-1.6 90.272,-1.092
  text "67.77 (mm)" at -3.022,40.891 h1.52 r270
  text "90.277 (mm)" at 37.364,-2.275 h1.52 r0.02